# EAGLE board Filter Board (EAGLE 9.2.2)
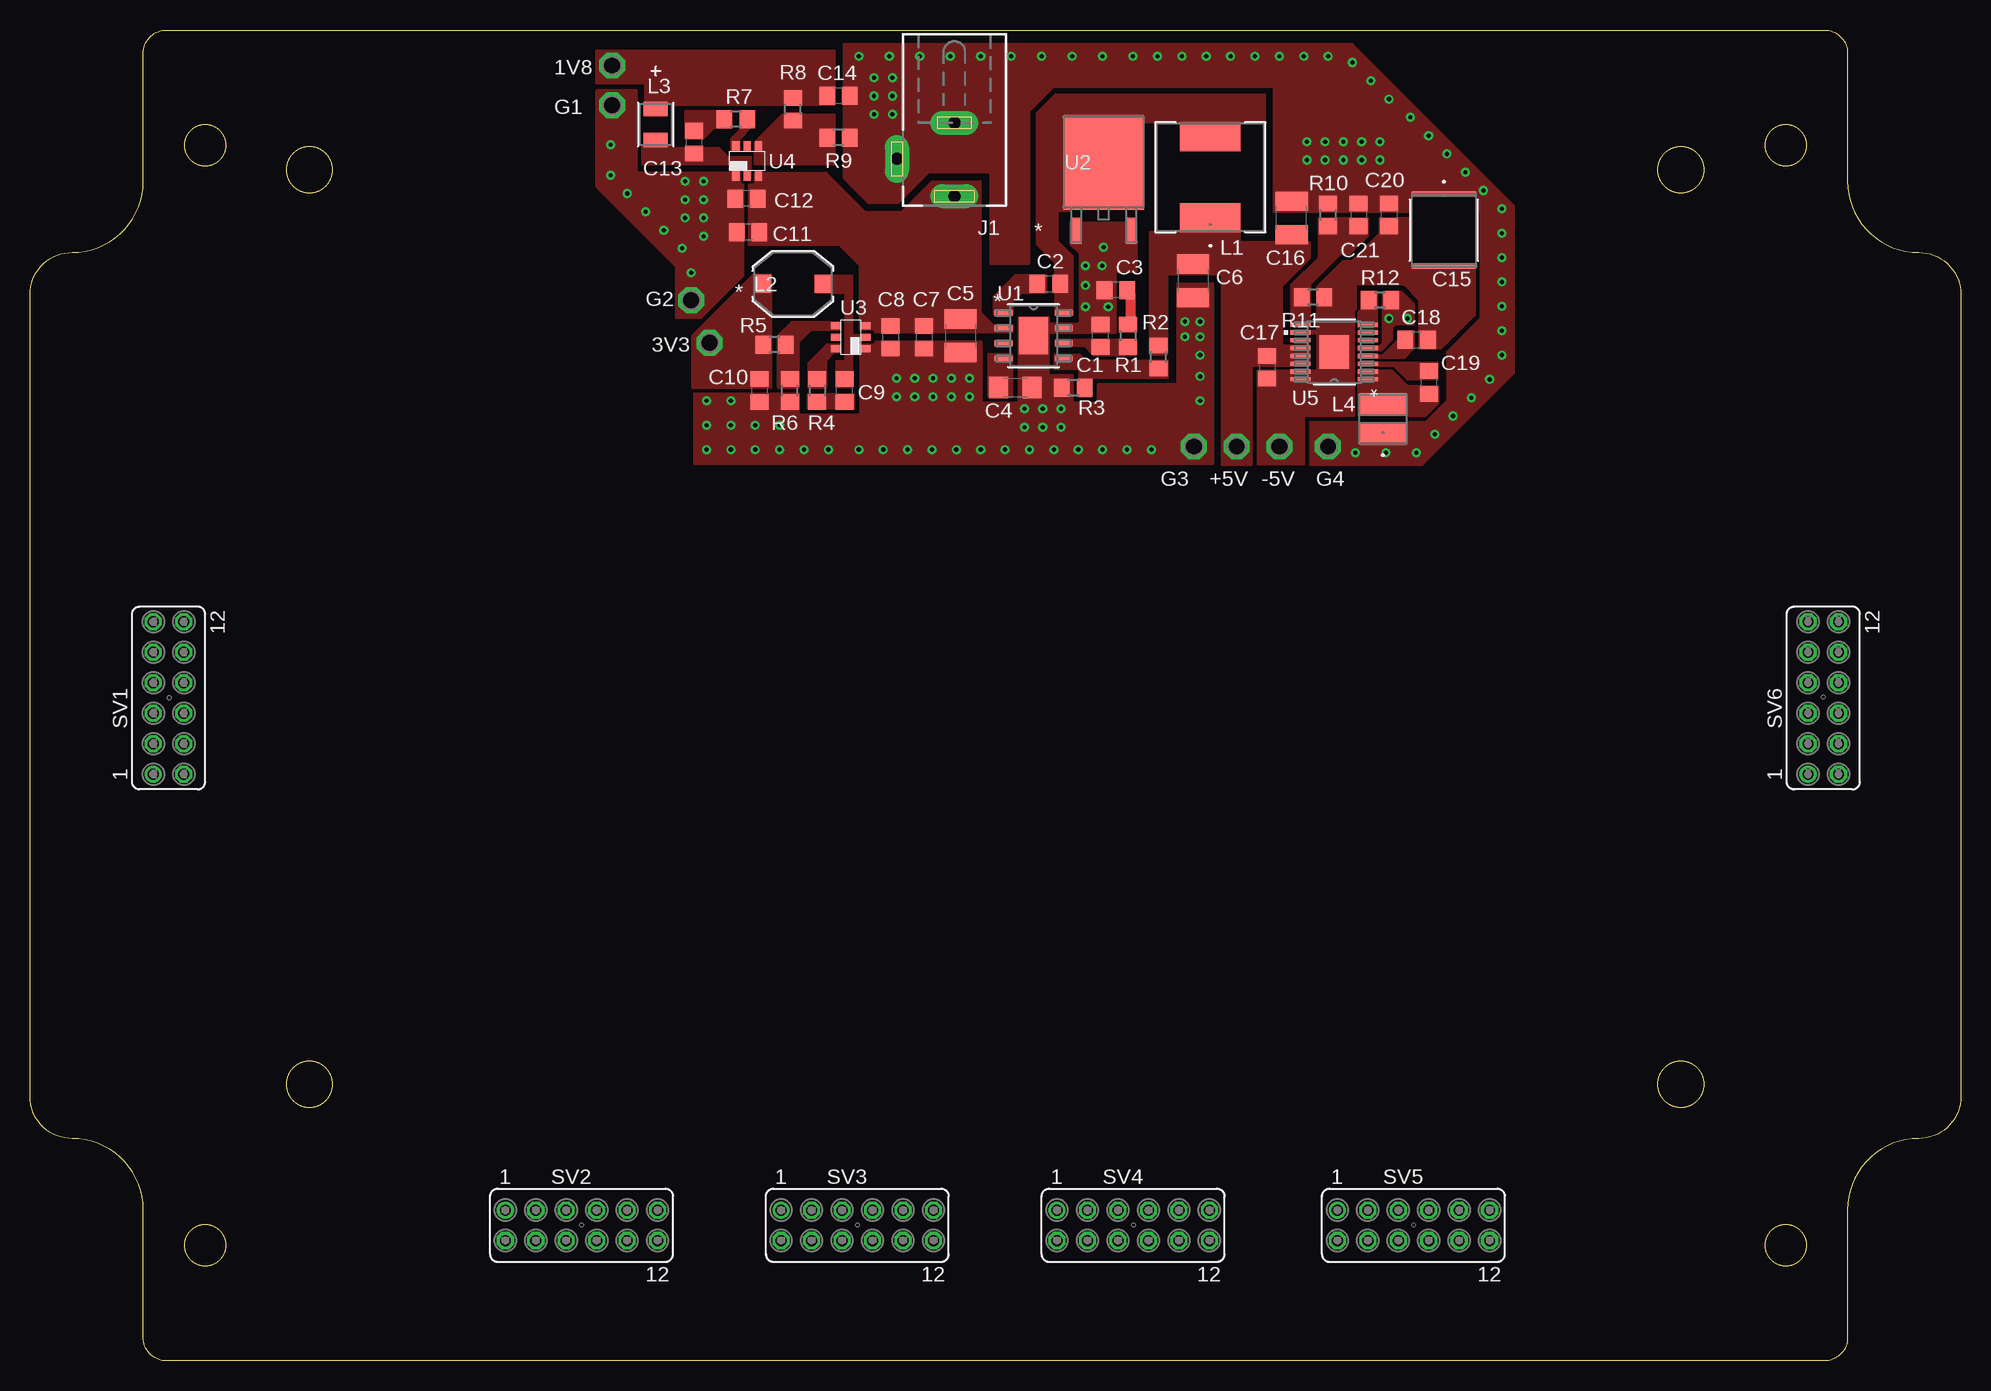
[diagram p0: board, top side]
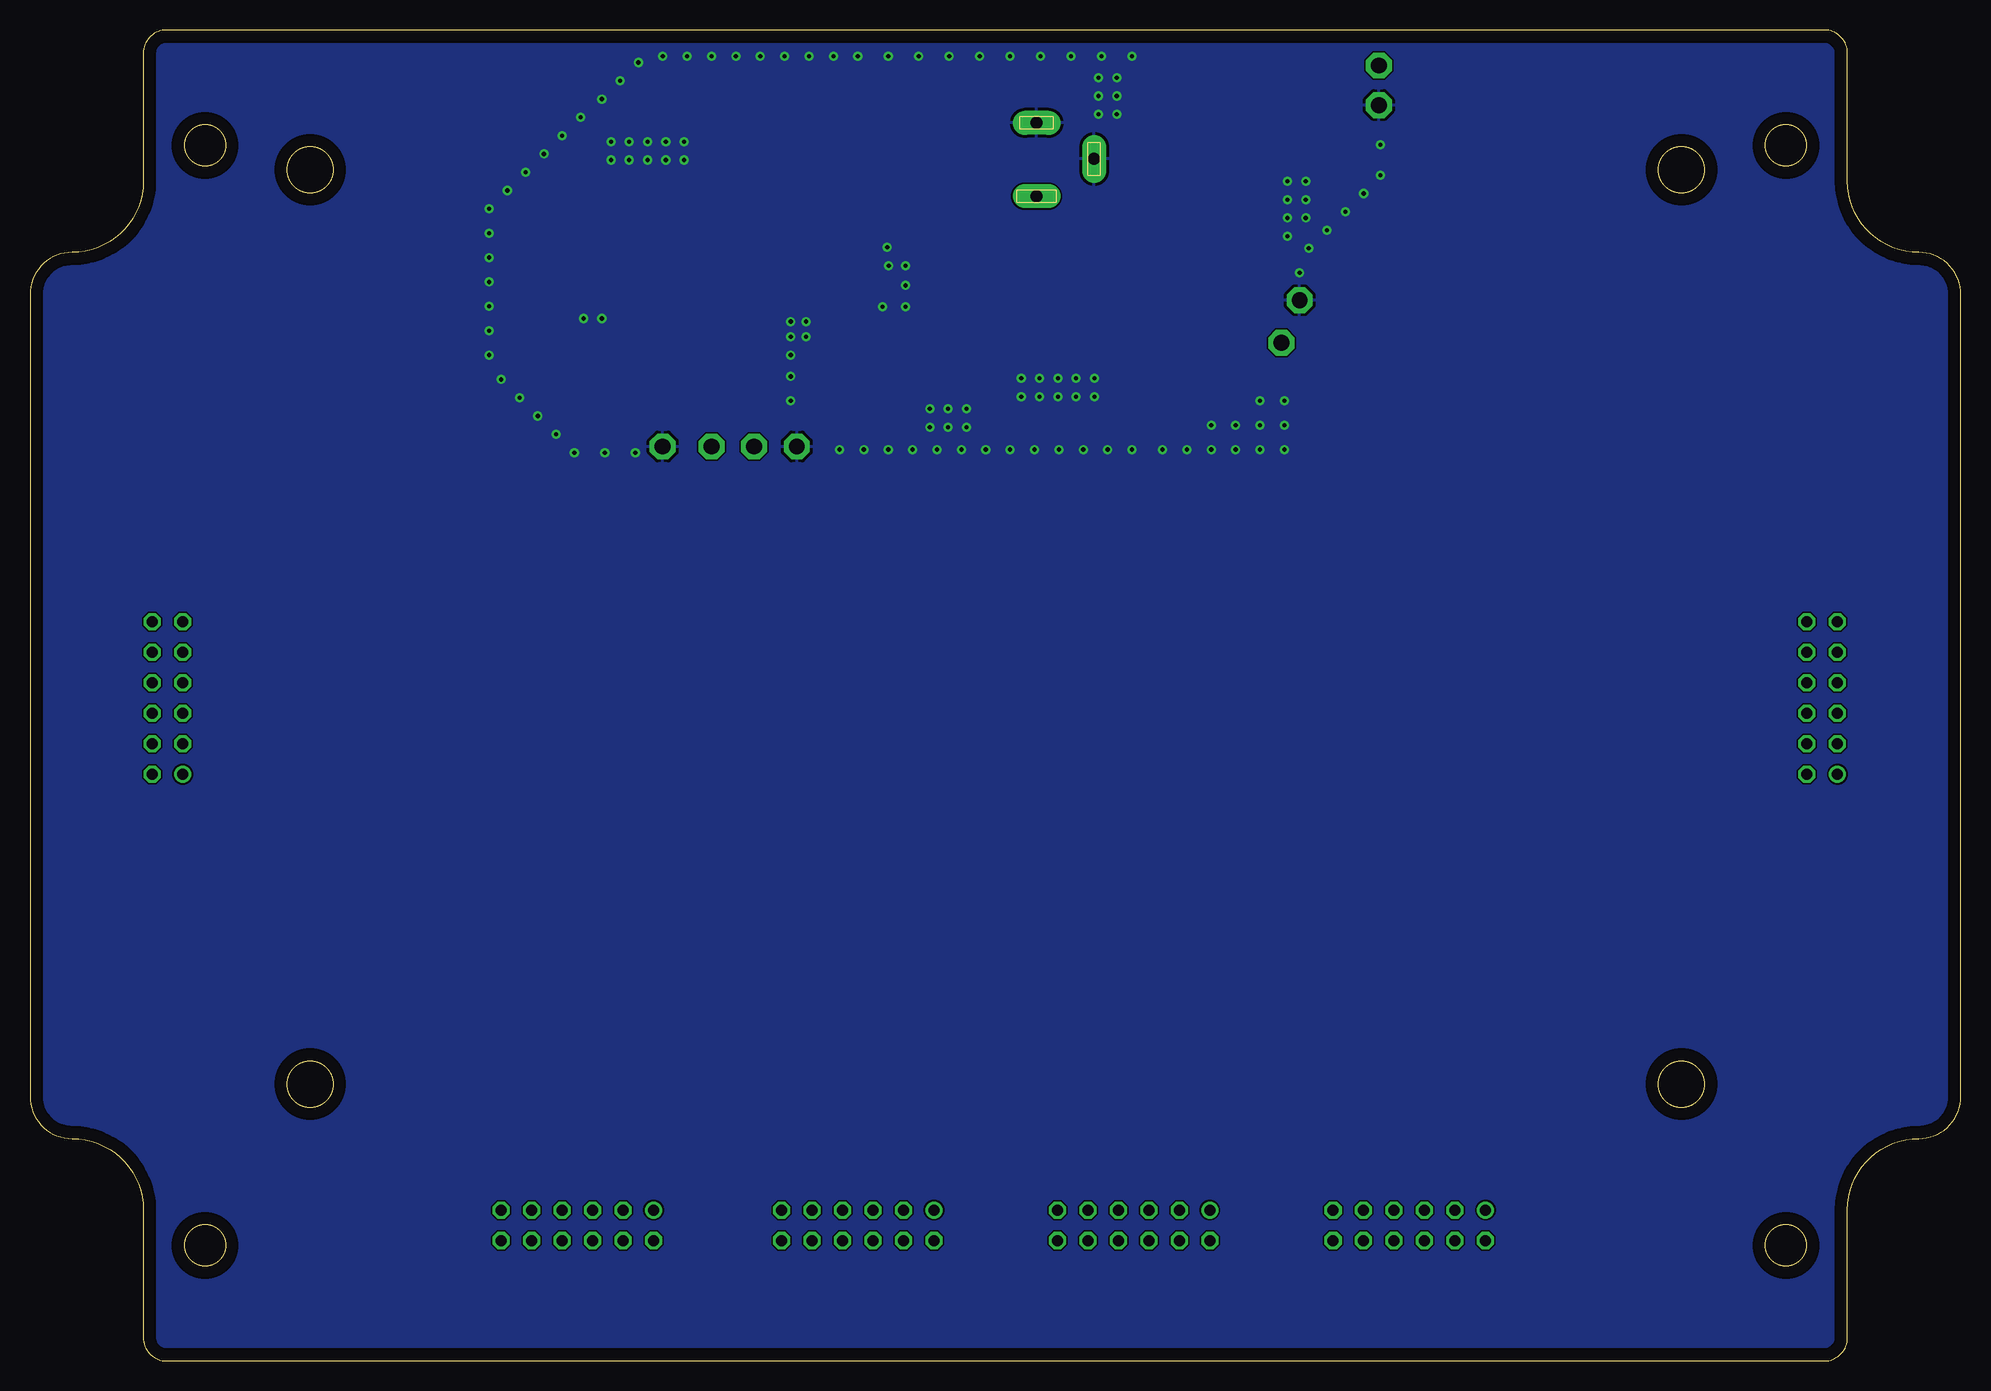
[diagram p1: board, bottom side, seen from below]

Size 160.95 x 110.91 mm. Coordinates in mm from the lower left corner, seen from the top.
Outline: 149.56,110.91 arc-90 151.5,108.97 151.5,98.32 arc90 157.44,92.38 arc-90 160.95,88.87 160.95,22.04 arc-90 157.44,18.53 arc90 151.5,12.59 151.5,1.94 arc-90 149.56,0 11.39,0 arc-90 9.45,1.94 9.45,12.59 arc90 3.51,18.53 arc-90 0,22.04 0,88.87 arc-90 3.51,92.38 arc90 9.45,98.32 9.45,108.97 arc-90 11.39,110.91 149.56,110.91
Outline: circle at 14.59,101.29 radius 1.7
Outline: circle at 146.36,9.62 radius 1.7
Outline: circle at 23.29,99.27 radius 1.91
Outline: circle at 146.36,101.29 radius 1.7
Outline: circle at 137.59,99.27 radius 1.91
Outline: circle at 137.59,23.07 radius 1.91
Outline: circle at 14.59,9.62 radius 1.7
Outline: circle at 23.29,23.07 radius 1.91
Copper layers (1*16): Top 0.035mm / dielectric 1.5mm / Bottom 0.035mm
Design rules "default": minimum track width 6mil, minimum drill 0.35mm, track to track 6mil, track to pad 6mil, pad to pad 6mil, via to via 6mil, smd to smd 6mil, copper to edge 40mil, drill to drill 6mil, minimum pad ring 10mil, minimum via ring 8mil, stop-mask expansion 4mil, vias tented up to drill 0mil, thermal gap 10mil

## Footprints (pad centres in the part's own frame; a part is rotated, then mirrored left to right if it is on the bottom)
P1-13 = drill 1.321 pad 2.159 octagon: TP 0,0
C0805 = smd 1.3 x 1.5: 1 -0.95,0; 2 0.95,0
C1206 = smd 1.6 x 1.8: 1 -1.4,0; 2 1.4,0
C1210 = smd 1.6 x 2.7: 1 -1.4,0; 2 1.4,0
CAP_5750-L = smd 0.356 x 5.309: 1 -3.023,0; 2 3.023,0
DCJ0202 = drill 1 pad 2 long: 1 0,3.1; 2 4.8,0; 3 0,-3
IND_IHLP-3232DZ = smd 2.413 x 5.055: 1 -3.391,0; 2 3.391,0
IND_5022 = smd 1.45 x 1.5: 1 -2.525,0; 2 2.525,0
IND_NLCV32TR = smd 1.194 x 2.007: 1 -1.295,0; 2 1.295,0
IND_IFSC_1515AH-L = smd 1.803 x 3.912: 1 -1.257,0; 2 1.257,0
R0805 = smd 1.3 x 1.5: 1 -0.95,0; 2 0.95,0
FE06-2 = drill 0.914: 1 -6.35,1.27 | drill 0.914 octagon: 2 -6.35,-1.27; 3 -3.81,1.27; 4 -3.81,-1.27; 5 -1.27,1.27; 6 -1.27,-1.27; 7 1.27,1.27; 8 1.27,-1.27; 9 3.81,1.27; 10 3.81,-1.27; 11 6.35,1.27; 12 6.35,-1.27
DDA8_3P1X2P4-L = smd 1.473 x 0.483: 1 -2.515,1.905; 2 -2.515,0.635; 3 -2.515,-0.635; 4 -2.515,-1.905; 5 2.515,-1.905; 6 2.515,-0.635; 7 2.515,0.635; 8 2.515,1.905 | smd 2.4 x 3.1: EPAD 0,0
DPAK-L = smd 0.889 x 2.184: 1 -2.29,-5.728; 3 2.29,-5.728 | smd 6.731 x 7.899: 2 0,-0.051
TSOT23-6_DDC = smd 0.6 x 0.8: 1 -0.95,-1.25; 2 0,-1.25; 3 0.95,-1.25; 4 0.95,1.25; 5 0,1.25; 6 -0.95,1.25
PWP16 = smd 1.676 x 0.356: 1 -2.819,2.275; 2 -2.819,1.625; 3 -2.819,0.975; 4 -2.819,0.325; 5 -2.819,-0.325; 6 -2.819,-0.975; 7 -2.819,-1.625; 8 -2.819,-2.275; 9 2.819,-2.275; 10 2.819,-1.625; 11 2.819,-0.975; 12 2.819,-0.325; 13 2.819,0.325; 14 2.819,0.975; 15 2.819,1.625; 16 2.819,2.275 | smd 2.464 x 2.819: 17 0,0

## Placement (x,y rotation side)
1V8  TPPAD1-13  [P1-13]  48.51,107.95 0 top
3V3  TPPAD1-13  [P1-13]  56.64,84.84 0 top
+5V  TPPAD1-13  [P1-13]  97.03,76.2 0 top
-5V  TPPAD1-13  [P1-13]  104.14,76.2 0 top
C1  10pF  [C0805]  89.24,85.43 90 top
C2  100nF  [C0805]  84.92,89.75 0 top
C3  1.2nF  [C0805]  90.51,89.24 180 top
C4  8.2nF  [C1206]  82.13,81.11 0 top
C5  10uF  [C1210]  77.56,85.43 270 top
C6  47uF  [C1210]  96.94,90 270 top
C7  10uF  [C0805]  74.51,85.31 270 top
C8  100nF  [C0805]  71.72,85.31 270 top
C9  100nF  [C0805]  67.91,80.86 90 top
C10  22uF  [C0805]  60.79,80.86 270 top
C11  10uF  [C0805]  59.86,94.07 180 top
C12  100nF  [C0805]  59.73,96.86 180 top
C13  100nF  [C0805]  55.33,101.56 270 top
C14  22uF  [C0805]  67.4,105.45 0 top
C15  47uF  [CAP_5750-L]  117.86,94.23 270 top
C16  22uF  [C1210]  105.16,95.25 90 top
C17  4.7uF  [C0805]  103.12,82.8 270 top
C18  2.2uF  [C0805]  115.57,85.09 0 top
C19  [C0805]  116.59,81.53 270 top
C20  4.7uF  [C0805]  113.28,95.5 270 top
C21  33pF  [C0805]  110.74,95.5 270 top
G1  TPPAD1-13  [P1-13]  48.51,104.65 0 top
G2  TPPAD1-13  [P1-13]  55.12,88.39 0 top
G3  TPPAD1-13  [P1-13]  100.58,76.2 0 top
G4  TPPAD1-13  [P1-13]  108.2,76.2 0 top
J1  DCJ0202  [DCJ0202]  77.05,100.16 180 top
L1  IHLP3232DZER4R7M11  [IND_IHLP-3232DZ]  98.39,98.64 90 top
L2  4.7uH  [IND_5022]  63.59,89.75 0 top
L3  2.2uH  [IND_NLCV32TR]  52.16,103.04 270 top
L4  15uH  [IND_IFSC_1515AH-L]  112.78,78.49 90 top
R1  [R0805]  91.53,85.43 270 top
R2  [R0805]  94.07,83.65 90 top
R3  [R0805]  86.96,81.11 0 top
R4  30  [R0805]  65.62,80.86 270 top
R5  30.9k  [R0805]  62.06,84.67 180 top
R6  10k  [R0805]  63.33,80.86 90 top
R7  30  [R0805]  58.84,103.47 180 top
R8  12.4k  [R0805]  63.59,104.31 90 top
R9  10k  [R0805]  67.4,101.94 180 top
R10  1000k  [R0805]  108.2,95.5 90 top
R11  255k  [R0805]  106.93,88.65 180 top
R12  100k  [R0805]  112.52,88.39 180 top
SV1  [FE06-2]  11.56,55.24 90 top
SV2  [FE06-2]  45.97,11.3 0 top
SV3  [FE06-2]  68.96,11.3 0 top
SV4  [FE06-2]  91.95,11.3 0 top
SV5  [FE06-2]  115.32,11.3 0 top
SV6  [FE06-2]  149.48,55.24 90 top
U1  TPS54531DDARDDA8_3P1X2P4-L  [DDA8_3P1X2P4-L]  83.65,85.43 0 top
U2  VS-50WQ04FNPBFDPAK-L  [DPAK-L]  89.5,99.91 0 top
U3  TPS56339  [TSOT23-6_DDC]  68.41,85.31 90 top
U4  TPS56339  [TSOT23-6_DDC]  59.78,99.99 0 top
U5  LM43601PWPR  [PWP16]  108.71,84.07 180 top

## Library data of the parts
1V8 3V3 +5V -5V G1-G4 = testpad
C1-C14 C16-C21 = rcl; SPICEPREFIX: C
C15 = CGA9N3X7R1; MANUFACTURER_PART_NUMBER: CGA9N3X7R1C476M230KB; VENDOR: TDK
J1 = con-jack; OC_FARNELL: unknown; OC_NEWARK: unknown
L1 = IHLP-3232DZ; MANUFACTURER_PART_NUMBER: IHLP3232DZER4R7M11; VENDOR: VISHAY
L2 = LTF5022T
L3 = NCLV32T; MANUFACTURER_PART_NUMBER: NLCV32T2R2MPFR; VENDOR: TDK
L4 = IFSC-1515A; MANUFACTURER_PART_NUMBER: IFSC1515AHER150M01; VENDOR: VISHAY
R1-R12 = rcl; SPICEPREFIX: R
SV1-SV6 = con-lsta; OC_FARNELL: unknown; OC_NEWARK: unknown
U1 = TPS54531DDAR; MANUFACTURER_PART_NUMBER: TPS54531DDAR; VENDOR: Texas Instruments
U2 = 50WQ04FN; MANUFACTURER_PART_NUMBER: VS50WQ04FNPBF; VENDOR: Vishay
U3 U4 = TPS56339
U5 = LM3601PWP; MANUFACTURER_PART_NUMBER: LM43601PWPR; VENDOR: Texas Instruments

## Nets
1V8: 1V8.TP C14.1 L3.1 R8.2
3V3: 3V3.TP C10.1 L2.1 R5.2
5V0: C6.1 C16.1 C17.1 G3.TP L1.1 R2.2 U5.12 U5.13 U5.14
12V0: C5.1 C7.1 C8.1 C11.1 C12.1 J1.1 U1.2 U3.3 U4.3
-5V0: -5V.TP C15.2 C17.2 C18.2 C20.2 R11.1 U5.10 U5.15 U5.16 U5.17
GND: +5V.TP C1.2 C3.2 C4.2 C5.2 C6.2 C7.2 C8.2 C10.2 C11.2 C12.2 C14.2 C15.1 C16.2 C20.1 C21.1 G1.TP G2.TP G4.TP J1.2 J1.3 L4.1 R3.1 R6.1 R9.1 R10.2 R12.1 U1.7 U1.EPAD U2.1 U2.3 U3.1 U4.1 U5.5
N$1: C3.1 R1.1
N$2: R2.1 R3.2 U1.5
N$3: C2.1 U1.1
N$4: C2.2 L1.2 U1.8 U2.2
N$5: C4.1 U1.4
N$6: C1.1 R1.2 U1.6
N$7: R4.1 U3.6
N$8: C9.1 R4.2
N$9: C9.2 L2.2 U3.2
N$10: R7.1 U4.6
N$11: R5.1 R6.2 U3.4
N$12: C13.1 R7.2
N$13: C13.2 L3.2 U4.2
N$14: R8.1 R9.2 U4.4
N$15: C21.2 R10.1 R11.2 U5.9
N$16: C19.2 L4.2 U5.1 U5.2
N$18: C18.1 U5.4
N$19: C19.1 U5.3
N$20: R12.2 U5.8

## Tracks (layer width: path | path; a pad name or v marks a point on that pad's centre or on a via)
1V8
  pour Top (no thermals): 51.31,103.89 51.31,106.43 47.24,106.43 47.24,109.22 67.06,109.22 67.06,104.65 53.09,104.65 53.09,103.89
3V3
  pour Top (no thermals): 61.81,90.51 60.29,90.51 55.21,85.43 55.21,81.11 61.81,81.11
5V0
  pour Top (no thermals): 95.85,94.07 93.31,94.07 93.31,83.91 94.83,83.91 94.83,90.51 99.31,90.55 99.31,74.68 101.85,74.68 101.85,82.93 106.68,82.93 106.68,84.58 104.39,84.58 104.39,89.62 106.68,91.9 106.68,93.22 100.84,93.22 100.93,96.35 95.85,96.35
12V0
  pour Top (no thermals): 81.88,85.69 70.45,85.69 70.45,85.94 69.18,85.94 69.18,91.27 67.49,92.96 59.94,92.96 59.94,98.04 60.45,98.04 60.45,99.02 63.46,99.02 66.3,99.05 69.6,95.76 72.64,95.76 75.18,98.3 79.25,98.3 79.25,87.38 80.26,86.36 81.88,86.36
-5V0
  pour Top (no thermals): 102.36,82.55 107.31,82.55 107.31,85.6 105.16,85.6 105.16,85.85 107.31,85.85 107.31,89.53 109.47,91.69 110.24,91.69 112.52,93.98 112.52,95.25 120.4,95.25 120.4,87.12 117.6,84.33 115.82,84.33 115.82,88.39 114.55,89.66 110.49,89.66 110.49,87.63 110.36,87.5 110.36,78.74 106.17,78.74 106.17,74.68 102.36,74.68
GND  (via drill 0.35)
  other vias: 89.5,92.8 87.97,91.27 89.88,87.85 87.97,87.85 89.37,91.27 87.97,89.62 82.89,79.34 84.42,79.34 85.94,79.34 72.22,81.88 73.75,81.88 75.27,81.88 76.8,81.88 78.32,81.88 78.32,80.35 76.8,80.35 75.27,80.35 73.75,80.35 72.22,80.35 82.89,77.81 84.42,77.81 85.94,77.81 54.61,98.3 56.13,98.3 54.61,96.77 54.61,95.25 56.13,96.77 56.13,95.25 56.13,93.73 66.55,75.95 56.39,80.01 58.42,75.95 60.45,75.95 62.48,75.95 64.52,75.95 81.28,75.95 69.09,75.95 71.12,75.95 73.15,75.95 75.18,75.95 77.22,75.95 79.25,75.95 48.39,98.81 49.78,97.28 51.31,95.76 52.83,94.23 55.12,90.68 54.36,92.71 48.39,101.35 87.38,75.95 89.41,75.95 91.44,75.95 93.47,75.95 111.76,106.68 113.28,105.16 110.24,108.2 106.43,100.08 106.43,101.6 108.2,108.71 106.17,108.71 104.14,108.71 102.11,108.71 100.08,108.71 98.04,108.71 96.01,108.71 93.98,108.71 91.95,108.71 89.41,108.71 86.87,108.71 84.33,108.71 81.79,108.71 79.25,108.71 76.71,108.71 74.17,108.71 71.63,108.71 69.09,108.71 71.88,106.93 70.36,106.93 70.36,105.41 71.88,105.41 71.88,103.89 70.36,103.89 96.27,86.61 96.27,85.34 97.54,86.61 97.54,85.34 97.54,83.82 97.54,82.04 97.54,80.01 113.28,86.87 114.81,86.87 115.06,103.63 116.59,102.11 118.11,100.58 119.63,99.06 121.16,97.54 122.68,96.01 122.68,93.98 122.68,91.95 122.68,89.92 122.68,87.88 122.68,85.85 122.68,83.82 121.67,81.79 120.14,80.26 118.62,78.74 117.09,77.22 115.57,75.69 113.03,75.69 110.49,75.69 107.95,101.6 107.95,100.08 109.47,101.6 109.47,100.08 111,100.08 111,101.6 112.52,101.6 112.52,100.08 58.42,77.98 60.45,77.98 56.39,77.98 62.48,77.98 58.42,80.01 56.39,75.95 83.31,75.95 85.34,75.95
  pour Top (no thermals): 90.51,85.69 90.51,90.77 92.29,90.77 92.29,94.83 86.7,94.83 86.7,93.05 87.46,92.29 87.46,86.45 84.92,86.45 84.92,86.96 82.38,86.96 82.38,79.84 79.34,79.84 79.34,84.92 70.45,84.92 70.45,84.67 69.18,84.67 69.18,78.83 64.1,78.83 64.1,80.61 55.37,80.61 55.37,74.76 98.64,74.76 98.64,89.75 95.59,89.75 95.59,81.37 88.99,81.37 88.99,79.84 86.96,79.84 86.96,82.13 84.92,82.13 84.92,85.69
  pour Bottom: 0.09,0.09 160.87,0.09 160.87,111.09 0.09,111.09
  pour Top (no thermals): 67.82,109.73 67.82,98.55 69.85,96.52 72.39,96.52 74.93,99.06 80.01,99.06 80.01,91.44 83.31,91.44 83.31,104.14 85.34,106.17 103.63,106.17 103.63,95.76 120.9,95.76 120.9,86.87 118.11,84.07 118.11,80.01 116.33,78.23 106.68,78.23 106.68,74.68 116.08,74.68 123.7,82.3 123.7,96.27 110.24,109.73
  pour Top (no thermals): 113.03,89.15 114.3,89.15 115.32,88.14 115.32,86.36 113.79,86.36 113.54,86.11 113.54,85.09 112.65,84.2 110.74,84.2 110.74,84.58 112.52,84.58 112.78,84.84 112.78,88.9
  pour Top (no thermals): 47.24,105.92 50.55,105.92 50.55,99.06 59.18,99.06 59.18,98.04 59.44,98.04 59.44,90.42 55.88,86.87 53.85,86.87 53.85,91.19 47.24,97.79
N$1
  Top 0.152: 91.46,86.45 R1.1
  Top 0.508: C3.1 91.72,88.99 | 91.72,86.57 R1.1
  Top 0.813: 91.72,88.99 91.72,86.57
N$2
  pour Top (no thermals): 85.43,82.64 85.43,83.91 87.46,83.91 87.97,83.4 94.83,83.4 94.83,81.88 88.48,81.88 88.48,80.35 87.46,80.35 87.46,82.64
N$3
  pour Top (no thermals): 80.35,87.21 80.35,88.73 82.13,90.51 84.67,90.51 84.67,88.99 82.64,88.99 81.88,88.23 81.88,87.21
N$4
  Top 0.762: C2.2 85.62,90
  pour Top (no thermals): 85.43,87.21 86.96,87.21 86.96,92.04 85.69,93.31 85.69,95.85 92.29,95.85 92.29,103.21 95.85,103.21 95.85,100.93 102.96,100.93 102.96,105.5 85.43,105.5 83.91,103.97 83.91,93.05 85.43,91.53
N$5
  pour Top (no thermals): 81.88,83.91 79.84,83.91 79.84,80.35 81.88,80.35
N$6
  pour Top (no thermals): 85.47,84.58 87.88,84.58 88.65,83.82 92.2,83.82 92.2,85.09 85.47,85.09
N$7
  pour Top (no thermals): 67.53,84.67 66.38,84.67 64.86,83.15 64.86,81.11 66.38,81.11 66.38,83.4 67.02,84.04 67.53,84.04
N$8
  pour Top (no thermals): 64.86,80.61 68.67,80.61 68.67,79.34 64.86,79.34
N$9
  pour Top (no thermals): 65.53,89.03 67.94,89.03 67.94,83.31 67.18,83.31 67.18,81.15 68.58,81.15 68.58,85.09 69.98,85.09 69.98,85.47 68.58,85.47 68.58,90.42 65.53,90.42
N$10
  pour Top (no thermals): 59.18,100.84 59.18,101.85 60.2,102.87 60.2,104.14 59.18,104.14 59.18,102.62 58.42,101.85 58.42,100.84
N$11
  pour Top (no thermals): 65.11,85.94 67.53,85.94 67.53,86.58 63.46,86.58 62.32,85.43 62.32,81.11 64.1,81.11 64.1,84.92
N$12
  pour Top (no thermals): 56.13,101.85 57.02,102.74 58.42,102.74 58.42,104.14 54.61,104.14 54.61,101.85
N$13
  pour Top (no thermals): 51.05,99.69 51.05,102.36 53.34,102.36 53.34,101.09 57.4,101.09 58.17,100.33 60.07,100.33 60.07,98.55 59.56,98.55 59.56,99.69
N$14
  pour Top (no thermals): 67.06,99.69 60.45,99.69 60.45,101.6 62.74,103.89 67.06,103.89
N$15
  pour Top (no thermals): 106.68,86.23 105.16,86.23 105.16,89.66 107.44,91.95 107.44,95.25 111.51,95.25 111.51,93.73 109.98,92.2 109.22,92.2 106.68,89.66
N$16
  pour Top (no thermals): 110.74,78.74 110.74,82.55 113.54,82.55 114.81,81.28 117.35,81.28 117.35,79.76 116.33,78.74
N$18
  pour Top (no thermals): 110.74,83.82 112.78,83.82 114.05,85.09 114.05,85.85 115.32,85.85 115.32,84.33 114.55,83.57 110.74,83.57
N$19
  pour Top (no thermals): 110.74,82.93 113.67,82.93 114.81,81.79 117.35,81.79 117.35,83.19 110.74,83.19
N$20
  pour Top (no thermals): 110.74,86.11 110.74,87.38 111,87.63 111,89.15 112.27,89.15 112.27,86.11